# Altium PCB v0.PcbDoc
Units mm, origin at the board's own origin, x right, y up, seen from the top; angles counter-clockwise.
Board outline 22 x 44.02 mm, 2 copper layers (Top Layer, Bottom Layer), stack 0.325 mm thick; 50 components, 35 nets, 127 pads, 208 vias.
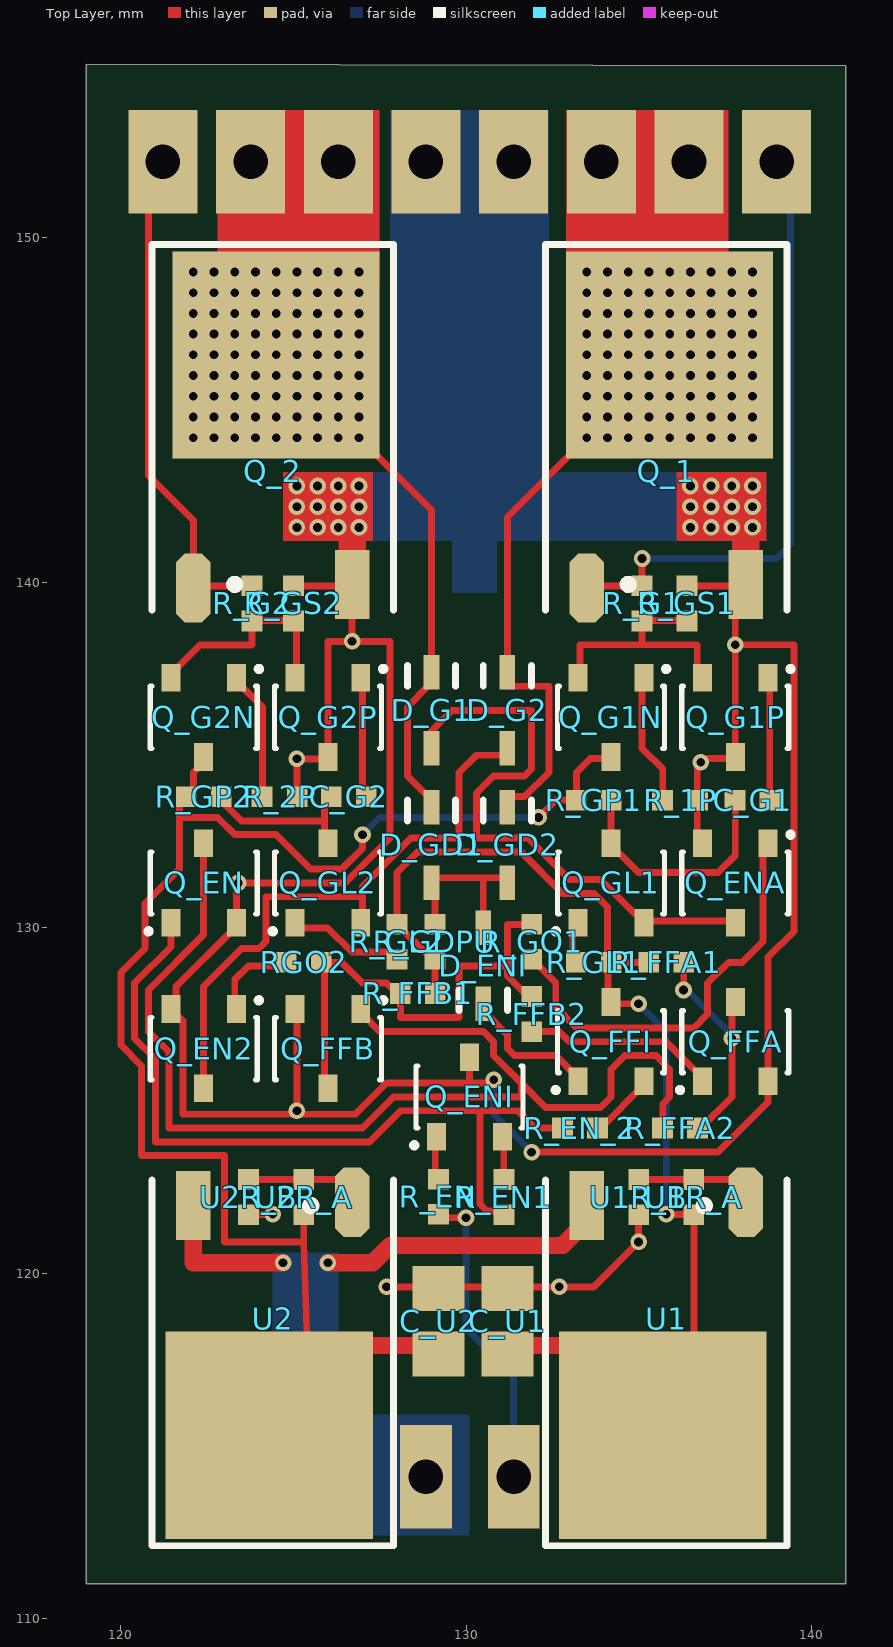
[diagram p0: Top Layer view]
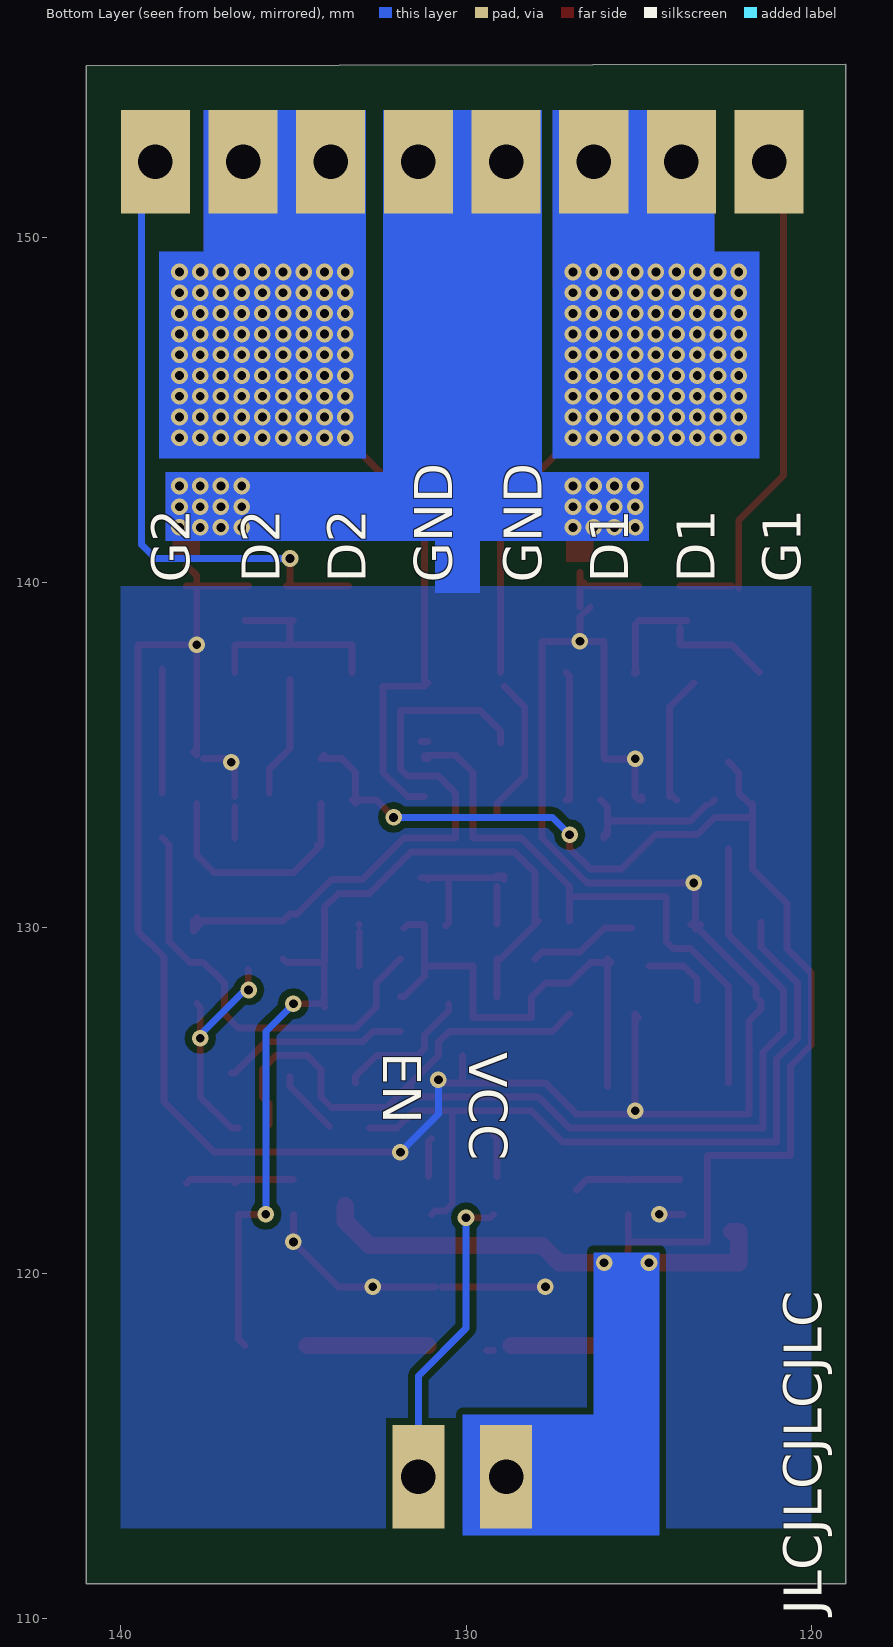
[diagram p1: Bottom Layer view, seen from below]
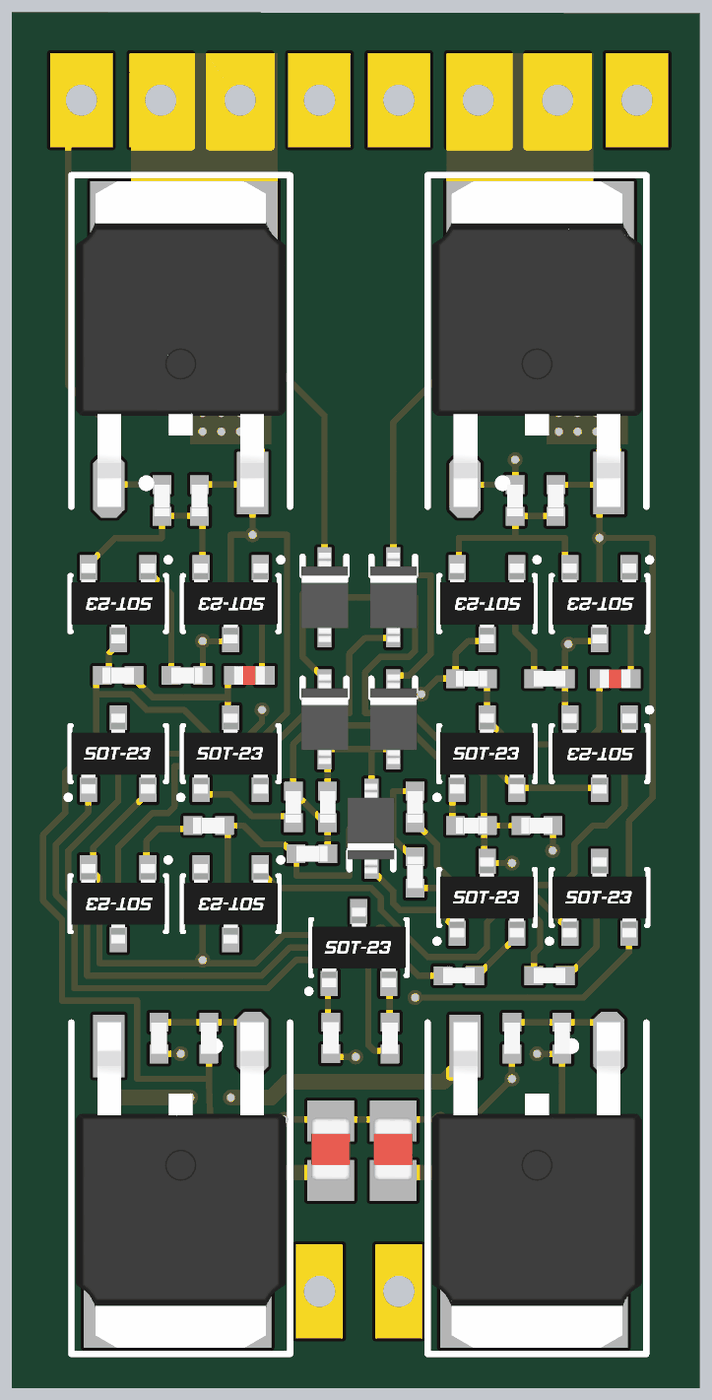
[diagram p2: 3D render of the assembled board from above, using the file's embedded part models]

## Layer stack, top to bottom
Top Solder: solder mask 0.0102, Solder Resist, Dk 3.5
Top Layer: signal copper 0.0356
Dielectric 1: core 0.254, FR-4, Dk 4.2
Bottom Layer: signal copper 0.0356
Bottom Solder: solder mask 0.0102, Solder Resist, Dk 3.5

## Board outline
119,111 119,155.016 141,154.981 141,111

## Design rules (kind name [scope] priority, off if disabled: settings)
Clearance [All] p1: gap=0.2 ignorepadtopadclearanceinfootprint=FALSE except(0: Arc-Hole Track-Hole SMDPad-Hole THPad-Hole Via-Hole Fill-Hole Poly-Hole Region-Hole Text-Hole)
PolygonConnect [All] p1: thpad.connectstyle=Relief thpad.reliefconductorwidth=0.254 thpad.reliefentries=4 thpad.polygonreliefangle="90 Angle" thpad.airgapwidth=0.254 smdpad.connectstyle=Relief smdpad.reliefconductorwidth=0.254 smdpad.reliefentries=4 smdpad.polygonreliefangle="90 Angle" smdpad.airgapwidth=0.254 via.connectstyle=Direct via.reliefconductorwidth=0.254 via.reliefentries=4 via.polygonreliefangle="90 Angle" via.airgapwidth=0.254
RoutingVias [All] p1: holewidth=0.711 width=1.27 viastyle="Through Hole" minholewidth=0.711 minwidth=1.27 maxholewidth=0.711 maxwidth=1.27
SolderMaskExpansion [All] p1: expansion=0.102
Width [All] p1: maxlimit=1 minlimit=0.2 preferedwidth=0.2 minimp=50.000000 maximp=50.000000 favimp=50.000000
30 further rules are at their usual default settings.

## Components (designator, comment, footprint, x,y, rotation, side; value= is the part's Value field where it differs from the comment)
C_G1 "CL05B224KO5NNNC" "CAP 0402" 138.3,133.7 r0 top value=220nF
C_G2 "CL05B224KO5NNNC" "CAP 0402" 126.6,133.8 r0 top value=220nF
C_U1 "CL21A106KAYNNNE" "CAP 0805" 131.2,118.6 r270 top value=10uF
C_U2 "CL21A106KAYNNNE" "CAP 0805" 129.2,118.6 r270 top value=10uF
D_ENI "N4148WS" sod-323 130.5,128.9 r90 top
D_G1 "N4148WS" sod-323 129,136.3 r270 top
D_G2 "N4148WS" sod-323 131.2,136.3 r270 top
D_GD1 "N4148WS" sod-323 129,132.4 r270 top
D_GD2 "N4148WS" sod-323 131.2,132.4 r270 top
Q_1 "IPD034N06N3G" to-252-2 135.9,146.6 r90 top
Q_2 "IPD034N06N3G" to-252-2 124.5,146.6 r90 top
Q_EN "SS8050" SOT-23-3 122.4,131.3 r90 top
Q_EN2 "SS8050" SOT-23-3 122.4,126.5 r270 top
Q_ENA "SS8050" SOT-23-3 137.8,131.3 r270 top
Q_ENI "SS8050" SOT-23-3 130.1,125.1 r90 top
Q_FFA "SS8050" SOT-23-3 137.8,126.7 r90 top
Q_FFB "SS8050" SOT-23-3 126,126.5 r270 top
Q_FFI "SS8050" SOT-23-3 134.2,126.7 r90 top
Q_G1N "SS8050" SOT-23-3 134.2,136.1 r270 top
Q_G1P "SS8550" SOT-23-3 137.8,136.1 r270 top
Q_G2N "SS8050" SOT-23-3 122.4,136.1 r270 top
Q_G2P "SS8550" SOT-23-3 126,136.1 r270 top
Q_GL1 "SS8050" SOT-23-3 134.2,131.3 r90 top
Q_GL2 "SS8050" SOT-23-3 126,131.3 r90 top
R_1P "0402WGF1002TCE" "RES 0402" 136.2,133.7 r180 top value=10k
R_2P "0402WGF1002TCE" "RES 0402" 124.6,133.8 r0 top value=10k
R_EN "0402WGF1501TCE" "RES 0402" 129.2,122.208 r270 top value=1.5k
R_EN1 "0402WGF1501TCE" "RES 0402" 131.1,122.2 r270 top value=1.5k
R_EN_2 "0402WGF1002TCE" "RES 0402" 133.3,124.2 r180 top value=10k
R_FFA1 "0402WGF1002TCE" "RES 0402" 135.8,129 r180 top value=10k
R_FFA2 "0402WGF3902TCE" "RES 0402" 136.2,124.2 r180 top value=39k
R_FFB1 "0402WGF1002TCE" "RES 0402" 128.6,128.1 r0 top value=10k
R_FFB2 "0402WGF3902TCE" "RES 0402" 131.9,127.5 r90 top value=39k
R_G1 "0402WGF0000TCE" "RES 0402" 135.1,139.4 r90 top value=0R
R_G2 "0402WGF0000TCE" "RES 0402" 123.8,139.4 r90 top value=0R
R_GDPU "0402WGF1501TCE" "RES 0402" 129.1,129.6 r270 top value=1.5k
R_GL1 "0402WGF1002TCE" "RES 0402" 133.7,129 r0 top value=10k
R_GL2 "0402WGF1002TCE" "RES 0402" 128,129.6 r270 top value=10k
R_GO1 "0402WGF1501TCE" "RES 0402" 131.9,129.6 r270 top value=1.5k
R_GP1 "0402WGF1501TCE" "RES 0402" 133.7,133.7 r180 top value=1.5k
R_GP2 "0402WGF1501TCE" "RES 0402" 122.4,133.8 r0 top value=1.5k
R_GS1 "0402WGF1002TCE" "RES 0402" 136.4,139.4 r270 top value=10k
R_GS2 "0402WGF1002TCE" "RES 0402" 125,139.4 r90 top value=10k
RGO2 "0402WGF1501TCE" "RES 0402" 125.3,129 r0 top value=1.5k
U1 "LM317AG-TN3-R" TO-252-2 135.7,115.3 r270 top
U1R_A "0402WGF1002TCE" "RES 0402" 136.6,122.2 r90 top value=10k
U1R_B "0402WGF3301TCE" "RES 0402" 135,122.2 r90 top value=3.3k
U2 "LM317AG-TN3-R" TO-252-2 124.3,115.3 r270 top
U2R_A "0402WGF1002TCE" "RES 0402" 125.3,122.2 r90 top value=10k
U2R_B "0402WGF3301TCE" "RES 0402" 123.7,122.2 r90 top value=3.3k

## Footprints (in the part's own frame and the unit in brackets; to place one, negate y for a bottom-side part, rotate by r counter-clockwise, add the part's x,y. Pads: shape width x height; smd on the part's side, far side on the other; paste and mask are expansions set on the pad)
"CAP 0402" [mm] "Chip Capacitor; Body 1.0 x 0.5 mm (LxW typ)"
  rect 0.6x0.6 smd: 1(-0.508,0) 2(0.508,0)
  body extent -0.5,-0.3 0.5,0.3, height 0.2
"CAP 0805" [mm] "Chip Capacitor; Body 2.0 x 1.2 mm (LxW typ)"
  rect 1.3x1.5 smd: 1(-0.95,0) 2(0.95,0)
  body extent -1.05,-0.62 0.95,0.62, height 0.78
"RES 0402" [mm] "Body 1.0 x 0.5 mm (LxW typ)"
  rect 0.6x0.6 smd: 1(-0.508,0) 2(0.508,0)
  body extent -0.5,-0.25 0.5,0.25, height 0.35
sod-323 [mm] "SOD-323/SC-76; 2 Leads; Body 1.7 x 1.3 mm, (LxW)"
  rect 1x0.45 smd: 1(-1.1,0) 2(1.1,0)
  silkscreen extent -1.3,-0.7 -0.7,0.7, body extent -1.43,-0.74 1.43,0.76, height 1.12
SOT-23-3 [mm] "SOT-23-3 Leads; Body 3.1 x 3 mm, inc. leads (LxW max)"
  rect 0.8x0.55 smd: 1(-1.15,0.95) 2(-1.15,-0.95) 3(1.15,0)
  silkscreen extent -1.45,-1.55 0.9,1.65, body extent -1.28,-1.5 1.27,1.5, height 1
to-252-2 [mm] "DPAK"
  oct 2x1 smd: 1(-6.75,2.4)
  rect 6x6 smd: 2(0,0)
  rect 2x1 smd: 3(-6.65,-2.2)
  silkscreen extent -7.4,-3.4 3.2,3.6, body extent -7.41,-3.26 3.01,3.46, height 2.39
TO-252-2 [mm] "DPAK"
  oct 2x1 smd: 1(-6.75,2.4)
  rect 6x6 smd: 2(0,0)
  rect 2x1 smd: 3(-6.65,-2.2)
  silkscreen extent -7.4,-3.4 3.2,3.6, body extent -7.41,-3.26 3.01,3.46, height 2.39

## Part data
C_G1 C_G2: "CAPACITOR MLCC - 220nF 16V 0402", JLC Availability=Basic, LCSC Part #=C16772, WVDC=16
C_U1 C_U2: "CAPACITOR MLCC - 10uF 25V 0805", LCSC Part #=C15850, Availability=Basic, WVDC=25
D_ENI D_G1 D_G2 D_GD1 D_GD2: "DIODE - 100V 150MA 1.25V @ 150MA 4NS SOD-323", JLC Availability=Basic, LCSC Part #=C2128, If=150mA, PIV=100V, Trr=4ns
Q_1 Q_2: "MOSFET (N) - TRENCH 60V 100A 4V @ 93UA 3.4 M? @ 100A,10V TO-252-2(DPAK) ROHS", JLC Availability=Extended, LCSC Part #=C94897
Q_EN Q_EN2 Q_ENA Q_ENI Q_FFA Q_FFB Q_FFI Q_G1N Q_G2N Q_GL1 Q_GL2: "BJT NPN - 25V 1.5A", JLC Availability=Basic, LCSC Part #=C2150
Q_G1P Q_G2P: "BJT PNP - 25V 1.5A", JLC Availability=Basic, LCSC Part #=C8542
R_1P R_2P R_EN_2 R_FFA1 R_FFB1 R_GL1 R_GL2 R_GS1 R_GS2 U1R_A U2R_A: "RESISTOR SMD - 10k 1% 0402", JLC Availability=Basic, LCSC Part #=C25744
R_EN R_EN1 R_GDPU R_GO1 R_GP1 R_GP2 RGO2: "RESISTOR SMD - 1.5k 1% 0402", JLC Availability=Basic, LCSC Part #=C25867
R_FFA2 R_FFB2: "RESISTOR SMD - 39k 1% 0402", JLC Availability=Basic, LCSC Part #=C25783
R_G1 R_G2: "RESISTOR SMD - 0R 1% 0402", JLC Availability=Basic, LCSC Part #=C17168
U1 U2: "IC - LDO", JLC Availability=Basic, LCSC Part #=C75510, VOut=ADJ
U1R_B U2R_B: "RESISTOR SMD - 3.3k 1% 0402", JLC Availability=Basic, LCSC Part #=C25890

## Free pads (board coordinates)
  rect 2x3 hole 1: M(121.22,152.2) M(123.76,152.2) M(126.3,152.2) M(128.84,152.2) M(131.38,152.2) M(133.92,152.2) M(136.46,152.2) M(139,152.2)
  rect 1.5x3 hole 1: M(128.84,114.1) M(131.38,114.1)

## Via types
v1: diameter 0.48, hole 0.254, Top Layer to Bottom Layer, tented both sides, 208 vias

## Nets (pads, with @x,y where several pads share a name; then routed paths per layer and width w, separated by ;. In a path a pad name is that pad's centre, name@x,y a point inside that pad or via, vN(x,y) a via of type N, cw(c..) or ccw(c..) an arc to the next point about the centre after c; other vN are vias at no path point)
DO_IT: pad.M@131.38,114.1 R_EN.2 | length 8.8
  Top Layer w0.2: R_EN.2 129.3,121.6 v1(130,121.6)
  Bottom Layer w0.2: v1@130,121.5 130,118.4 131.38,117.02 pad.M@131.38,114.1
GND: C_U1.1 C_U2.1 pad.M@128.84,152.2 pad.M@131.38,152.2 Q_1.3 Q_2.3 Q_EN2.2 Q_EN.2 Q_ENA.2 Q_ENI.3 Q_FFA.2 Q_FFB.2 Q_G1P.3 Q_G2P.3 R_1P.1 R_2P.2 R_GS1.1 R_GS2.2 U1R_B.1 U2R_B.1 | length 87.8
  Top Layer w0.2: Q_EN2.2@121.45,127.85 Q_EN2.2 121.8,127.3 121.8,124.6 v1@125.1,124.6 ; Q_EN2.2@121.5,127.9 121.6,128 121.6,128.3 Q_EN.2@123.3,130 ; Q_EN.2@123.2,130.1 Q_EN.2@123.3,130 ; Q_EN.2@123.35,129.95 Q_EN.2@123.3,130 ; Q_EN.2@123.4,130.2 Q_EN.2 123.35,131.3 126.5,131.3 127.8,132.6 127.8,138.3 v1(126.7,138.3) 126.7,139 Q_2.3@126.4,139.3 ; Q_EN.2@123.5,130.1 123.4,130.1 Q_EN.2@123.3,130 ; U2R_B.1@123.708,121.7 v1@124.5,121.7 ; R_2P.2@124.9,133.708 124.9,133.808 R_2P.2@125.008,133.7 ; Q_FFB.2@125,127.4 125.1,127.5 v1@125.1,124.6 ; R_GS2.2 126.508,139.908 Q_2.3@126.6,140 ; R_2P.2 125.108,134.892 125.992,134.892 Q_G2P.3@126,134.9 ; Q_G2P.3@126,135 126,138.3 v1@126.6,138.3 ; Q_2.3@126.7,139.3 Q_2.3@126.7,140.3 ; v1(127.7,119.6) C_U1.1@130.7,119.6 ; Q_ENI.3@130.1,126.3 130.1,125.5 ; v1(130.8,125.6) 130.7,125.6 130.8,125.5 130.1,125.5 ; C_U1.1@130.9,119.6 v1(132.7,119.6) ; v1@132,123.5 137.3,123.5 138.75,124.95 Q_FFA.2 138.75,129.15 139.5,129.9 139.5,138.2 v1(137.8,138.2) ; v1@132.9,119.6 133.7,119.6 v1(135,120.9) U1R_B.1 ; R_GS1.1@136.3,139.9 Q_1.3@137.8,139.9 ; Q_ENA.2@136.7,132.6 R_1P.1@136.7,133.508 ; R_1P.1@136.7,133.8 136.7,134.6 137,134.9 Q_G1P.3@137.6,134.9 ; Q_G1P.3@137.8,135 Q_G1P.3@137.9,135.1 ; Q_G1P.3@137.8,135.1 v1(137.8,138.2) ; v1@137.8,138.4 v1(137.8,138.2) ; Q_1.3@138.1,139.9 Q_1.3@137.8,139.9 ; Q_1.3@138.1,140.5 137.8,140.2 Q_1.3@137.8,139.9 ; v1@125.1,124.6 126.8,124.6 127.7,125.5 130.1,125.5 ; v1(137.8,138.2) 137.8,138.6 Q_1.3@137.8,139.9
  Bottom Layer w0.2: v1@130.9,125.5 v1(130.8,125.6) 130.8,124.6 v1(131.9,123.5)
  other v1: 124.4,121.7 125.1,124.7 123.4,131.3 136.8,134.8 125.1,134.9 125.1,141.6 125.7,141.6 126.3,141.6 126.9,141.6 136.5,141.6 137.1,141.6 137.7,141.6 138.3,141.6 125.1,142.2 125.7,142.2 126.3,142.2 126.9,142.2 136.5,142.2 137.1,142.2 137.7,142.2 138.3,142.2 125.1,142.8 125.7,142.8 126.3,142.8 126.9,142.8 136.5,142.8 137.1,142.8 137.7,142.8 138.3,142.8
NetC_G1_1: C_G1.1 Q_GL1.3 R_GP1.1 | length 6.8
  Top Layer w0.2: Q_GL1.3@134.2,132.4 R_GP1.1@134.2,133.608 ; Q_GL1.3@134.3,132.4 134.3,132.3 135,131.6 137.3,131.6 137.8,132.1 C_G1.1@137.8,133.6
NetC_G1_2: C_G1.2 Q_G1P.1 | length 3.6
  Top Layer w0.2: C_G1.2@138.8,133.9 Q_G1P.1@138.8,137.5
NetC_G2_1: C_G2.1 Q_GL2.3 R_GP2.2 | length 5
  Top Layer w0.2: R_GP2.2@122.808,133.7 R_GP2.2@122.9,133.608 ; R_GP2.2@123.05,133.55 123.5,133.1 125.9,133.1 Q_GL2.3@125.9,132.7 ; C_G2.1@126.092,133.7 125.9,133.508 125.9,132.8 Q_GL2.3@126,132.7 ; Q_GL2.3@125.9,132.7 Q_GL2.3@126,132.7 ; Q_GL2.3@125.9,132.7 126,132.6 Q_GL2.3@126,132.7
NetC_G2_2: C_G2.2 Q_G2P.1 | length 3.9
  Top Layer w0.2: C_G2.2@127,133.708 127,137.3 Q_G2P.1@127.1,137.4 ; C_G2.2@127,133.8 127,133.808 C_G2.2@127.108,133.7
NetD_ENI_1: D_ENI.1 Q_FFI.1 | length 4.1
  Top Layer w0.2: D_ENI.1 130.5,127.6 131.2,126.9 131.2,126.5 131.4,126.3 132.6,126.3 133.2,125.7 Q_FFI.1@133.2,125.5
NetD_ENI_2: D_ENI.2 D_GD1.2 D_GD2.2 R_GDPU.1 | length 5.3
  Top Layer w0.2: D_GD1.2@128.9,131.4 128.95,131.45 129,131.45 D_GD1.2@129.1,131.45 ; D_GD1.2@128.9,131.5 129.1,131.5 D_GD1.2@129.1,131.45 ; R_GDPU.1 D_GD1.2@129.1,131.2 ; D_ENI.2@130.6,130.05 130.5,130.15 130.5,131.45 ; D_GD2.2@131.1,131.4 D_GD2.2@131.05,131.45 ; D_GD2.2@131.3,131.45 131.2,131.45 D_GD2.2@131.05,131.45 ; D_GD1.2@129.1,131.45 130.5,131.45 ; 130.5,131.45 D_GD2.2@131.05,131.45
NetD_G1_1: D_G1.1 D_GD1.1 pad.M@123.76,152.2 pad.M@126.3,152.2 Q_2.2 | length 13.5
  Top Layer w0.2: Q_2.2@125.9,145.2 129,142.1 D_G1.1 ; D_G1.1@128.9,137 128.3,136.4 128.3,134.4 129.1,133.6 D_GD1.1@129.1,133.2
  other v1: 122.1,144.2 122.7,144.2 123.3,144.2 123.9,144.2 124.5,144.2 125.1,144.2 125.7,144.2 126.3,144.2 126.9,144.2 122.1,144.8 122.7,144.8 123.3,144.8 123.9,144.8 124.5,144.8 125.1,144.8 125.7,144.8 126.3,144.8 126.9,144.8 122.1,145.4 122.7,145.4 123.3,145.4 123.9,145.4 124.5,145.4 125.1,145.4 125.7,145.4 126.3,145.4 126.9,145.4 122.1,146 122.7,146 123.3,146 123.9,146 124.5,146 125.1,146 125.7,146 126.3,146 126.9,146 122.1,146.6 122.7,146.6 123.3,146.6 123.9,146.6 124.5,146.6 125.1,146.6 125.7,146.6 126.3,146.6 126.9,146.6 122.1,147.2 122.7,147.2 123.3,147.2 123.9,147.2 124.5,147.2 125.1,147.2 125.7,147.2 126.3,147.2 126.9,147.2 122.1,147.8 122.7,147.8 123.3,147.8 123.9,147.8 124.5,147.8 125.1,147.8 125.7,147.8 126.3,147.8 126.9,147.8 122.1,148.4 122.7,148.4 123.3,148.4 123.9,148.4 124.5,148.4 125.1,148.4 125.7,148.4 126.3,148.4 126.9,148.4 122.1,149 122.7,149 123.3,149 123.9,149 124.5,149 125.1,149 125.7,149 126.3,149 126.9,149
NetD_G1_2: D_G1.2 Q_ENA.3 Q_GL1.2 | length 17.6
  Top Layer w0.2: D_G1.2@129,135.35 129,135.7 129.6,136.3 131.9,136.3 131.9,134.6 131.7,134.4 130.8,134.4 130.3,133.9 130.3,132.6 131.8,132.6 133,131.4 133.9,131.4 134.9,130.4 Q_GL1.2@135.1,130.4 ; Q_GL1.2@135.15,130.35 135.3,130.2 Q_ENA.3@137.6,130.2 ; Q_ENA.3@137.8,130.3 137.7,130.2 Q_ENA.3@137.6,130.2 ; Q_ENA.3@137.9,130.2 137.9,129.9 Q_ENA.3@137.6,130.2
NetD_G2_1: D_G2.1 D_GD2.1 pad.M@133.92,152.2 pad.M@136.46,152.2 Q_1.2 | length 15.2
  Top Layer w0.2: D_G2.1@131.1,137.1 D_G2.1@131.2,137 ; D_GD2.1@131.2,133.8 131.7,133.8 132.4,134.5 132.4,137 D_G2.1@131.2,137 ; Q_1.2@133.6,145.9 133.6,144.3 131.2,141.9 D_G2.1 D_G2.1@131.2,137
  other v1: 133.5,144.2 134.1,144.2 134.7,144.2 135.3,144.2 135.9,144.2 136.5,144.2 137.1,144.2 137.7,144.2 138.3,144.2 133.5,144.8 134.1,144.8 134.7,144.8 135.3,144.8 135.9,144.8 136.5,144.8 137.1,144.8 137.7,144.8 138.3,144.8 133.5,145.4 134.1,145.4 134.7,145.4 135.3,145.4 135.9,145.4 136.5,145.4 137.1,145.4 137.7,145.4 138.3,145.4 133.5,146 134.1,146 134.7,146 135.3,146 135.9,146 136.5,146 137.1,146 137.7,146 138.3,146 133.5,146.6 134.1,146.6 134.7,146.6 135.3,146.6 135.9,146.6 136.5,146.6 137.1,146.6 137.7,146.6 138.3,146.6 133.5,147.2 134.1,147.2 134.7,147.2 135.3,147.2 135.9,147.2 136.5,147.2 137.1,147.2 137.7,147.2 138.3,147.2 133.5,147.8 134.1,147.8 134.7,147.8 135.3,147.8 135.9,147.8 136.5,147.8 137.1,147.8 137.7,147.8 138.3,147.8 133.5,148.4 134.1,148.4 134.7,148.4 135.3,148.4 135.9,148.4 136.5,148.4 137.1,148.4 137.7,148.4 138.3,148.4 133.5,149 134.1,149 134.7,149 135.3,149 135.9,149 136.5,149 137.1,149 137.7,149 138.3,149
NetD_G2_2: D_G2.2 Q_EN2.3 Q_GL2.2 | length 17.4
  Top Layer w0.2: Q_EN2.3@122.4,125.5 122.4,128.3 123.5,129.4 124,129.4 124.2,129.6 124.2,130.9 127,130.9 ; Q_GL2.2@127,130.2 127,130.9 ; D_G2.2@131.1,134.9 D_G2.2@131.2,134.9 ; D_G2.2@131.1,135.4 D_G2.2@131.3,135.4 ; D_G2.2@131.2,135 130.3,135 129.8,134.5 129.8,132.6 128.4,132.6 127,131.2 127,130.9
NetQ_1_1: pad.M@139,152.2 Q_1.1 R_G1.2 | length 17.7
  Top Layer w0.2: Q_1.1@133.4,139.9 R_G1.2@135.2,139.9 ; R_G1.2 v1(135.1,140.7)
  Bottom Layer w0.2: v1(135.1,140.7) 139,140.7 139.4,141.1 pad.M@139.4,151.7
NetQ_2_1: pad.M@121.22,152.2 Q_2.1 R_G2.2 | length 13.5
  Top Layer w0.2: pad.M@120.8,151.3 120.8,143.1 122.1,141.8 Q_2.1 ; Q_2.1@122.3,139.908 R_G2.2@123.808,139.908
NetQ_EN2_1: Q_EN2.1 RGO2.1 | length 2.2
  Top Layer w0.2: Q_EN2.1@123.3,127.9 123.3,128.5 123.7,128.9 RGO2.1@124.7,128.9
NetQ_EN_1: Q_EN.1 R_EN1.2 R_EN_2.2 | length 22.8
  Top Layer w0.2: Q_EN.1 121.45,129.45 120.4,128.4 120.4,126.8 121,126.2 121,123.8 127.2,123.8 128.1,124.7 130.4,124.7 ; R_EN1.2@131,121.7 130.9,121.8 130.6,121.8 130.4,122 130.4,124.7 ; R_EN_2.2@132.8,124.2 R_EN_2.2 132,124.2 131.5,124.7 130.4,124.7
NetQ_EN_3: Q_EN.3 Q_FFB.1 R_FFA2.2 | length 33.2
  Top Layer w0.2: Q_EN.3@122.4,132.3 122.4,129.8 120.8,128.2 120.8,127 121.4,126.4 121.4,124.2 127,124.2 127.9,125.1 131.6,125.1 131.6,125.5 ; Q_FFB.1@127,127.5 127.5,127 130.5,127 130.8,126.7 130.8,126.3 131.6,125.5 ; R_FFA2.2@135.7,124.3 135.7,124.9 135.9,125.1 135.9,125.9 135.5,126.3 134.6,126.3 134.2,125.9 134.2,125.1 133.9,124.8 132.3,124.8 131.6,125.5
NetQ_ENA_1: Q_ENA.1 R_GO1.2 | length 12.6
  Top Layer w0.2: R_GO1.2@131.9,129.1 R_GO1.2 131.908,129.092 132.6,128.4 132.6,127.7 133.2,127.1 136.6,127.1 137,127.5 137,128.4 137.6,129 138,129 138.6,129.6 138.6,132.4 Q_ENA.1@138.8,132.6
NetQ_ENI_1: Q_ENI.1 R_EN.1 | length 1.2
  Top Layer w0.2: R_EN.1@129.108,122.8 129.108,123.908 Q_ENI.1@129.2,124
NetQ_ENI_2: Q_ENI.2 R_EN1.1 | length 1.1
  Top Layer w0.2: Q_ENI.2@131,123.9 131.092,123.808 R_EN1.1@131.092,122.8
NetQ_FFA_1: Q_FFA.1 R_FFB2.1 | length 5.4
  Top Layer w0.2: R_FFB2.1@131.9,127 132.7,127 133,126.7 135.8,126.7 136.7,125.8 Q_FFA.1@136.8,125.8
NetQ_FFA_3: Q_FFA.3 R_FFA1.1 R_FFA2.1 | length 6.8
  Top Layer w0.2: v1@136.308,128.208 R_FFA1.1@136.308,128.8 ; R_FFA2.1@136.608,124.2 R_FFA2.1 136.8,124.2 137.7,125.1 137.7,127.7 137.8,127.8 Q_FFA.3@137.792,127.808
  Bottom Layer w0.2: v1(136.3,128.2) 136.4,128.2 137.7,126.9 v1(137.7,126.8)
NetQ_FFB_3: Q_FFB.3 R_FFB1.1 R_FFB2.2 R_GO1.1 RGO2.2 | length 14.7
  Top Layer w0.2: RGO2.2@125.8,129 125.9,129.1 RGO2.2@125.9,129 ; Q_FFB.3@125.9,125.4 RGO2.2@125.9,129 ; R_GO1.1@131.8,130 131.7,130.1 131.2,130.1 131.2,128.9 ; R_FFB2.2 131.792,128.008 131.2,128.6 131.2,128.9 ; RGO2.2@125.9,129 126.4,129 127,128.4 127.7,128.4 128.1,128 128.1,127.4 129.8,127.4 129.8,128.9 131.2,128.9
NetQ_FFI_2: Q_FFI.2 R_EN_2.1 | length 1.9
  Top Layer w0.2: R_EN_2.1@133.95,124.25 135.1,125.4 Q_FFI.2@135.1,125.7
NetQ_G1N_1: Q_G1N.1 R_1P.2 | length 4.2
  Top Layer w0.2: Q_G1N.1@135.1,137.2 135.1,135.2 135.7,134.6 ; 135.7,134.6 135.7,133.9 135.7,134.6
NetQ_G1N_2: Q_G1N.2 Q_G1P.2 R_G1.1 R_GS1.2 | length 6.9
  Top Layer w0.2: Q_G1N.2@133.3,137.4 133.3,138.2 135.1,138.2 136.7,138.2 Q_G1P.2@136.7,137.4 ; R_G1.1@135,138.9 R_GS1.2@136.4,138.9 ; 135.1,138.3 R_G1.1@135.1,138.8
NetQ_G2N_1: Q_G2N.1 R_2P.1 | length 3.9
  Top Layer w0.2: Q_G2N.1@123.4,137.1 124.1,136.4 R_2P.1@124.1,133.9 ; R_2P.1@123.9,133.7 R_2P.1@124.1,133.9 ; R_2P.1@124.1,133.8 R_2P.1@124.1,133.9
NetQ_G2N_2: Q_G2N.2 Q_G2P.2 R_G2.1 R_GS2.1 | length 6.2
  Top Layer w0.2: Q_G2N.2@121.5,137.4 122.3,138.2 122.7,138.2 ; 122.4,138.192 123.792,138.192 ; R_G2.1@123.6,138.908 R_GS2.1@125,138.908 ; 123.8,138.2 R_G2.1@123.8,138.7 ; Q_G2P.2@125.092,137.408 R_GS2.1@125.092,138.8
  Top Layer w0.254: Q_G2P.2@125.092,137.408 Q_G2P.2@125.1,137.4
NetQ_GL1_1: Q_GL1.1 R_GL1.1 | length 1
  Top Layer w0.2: R_GL1.1@133.092,128.9 Q_GL1.1@133.092,129.892 ; Q_GL1.1@133.092,130.092 Q_GL1.1@133.1,130.1
NetQ_GL2_1: Q_GL2.1 R_GL2.2 | length 3.2
  Top Layer w0.2: Q_GL2.1@125.2,130 125.992,130 126.692,129.3 127.8,129.3 R_GL2.2@128,129.1
NetU1_1: U1.1 U1R_A.2 U1R_B.2 | length 3.3
  Top Layer w0.2: U1R_B.2 136.592,122.708 U1R_A.2@136.7,122.6 ; U1R_A.2 137.992,122.708 U1.1@138.1,122.6
NetU2_1: U2.1 U2R_A.2 U2R_B.2 | length 3
  Top Layer w0.2: U2R_B.2@123.8,122.708 125.292,122.708 U2R_A.2@125.3,122.7 ; U2R_A.2@125.4,122.708 126.492,122.708 U2.1@126.8,122.4
VCC: pad.M@128.84,114.1 U1.3 U2.3 | length 13.4
  Top Layer w0.5: U2.3@122.3,121.2 122.1,121.2 122.1,120.3 v1(124.7,120.3) ; v1(126,120.3) 127.3,120.3 127.8,120.8 132.8,120.8 133.5,121.5 U1.3
  Bottom Layer w0.5: v1(124.7,120.3) v1(126,120.3)
VCC_5: C_U1.2 Q_FFI.3 R_FFA1.2 R_FFB1.2 R_GDPU.2 R_GL1.2 R_GL2.1 U1.2 U1R_A.1 | length 30.7
  Top Layer w0.2: R_GL2.1@127.9,130.2 129.008,129.092 R_GDPU.2 ; R_GL2.1 128,131.6 128.6,132.2 131.6,132.2 132.8,131 133.7,131 134.1,130.6 R_GL1.2@134.1,129 ; R_FFB1.2@129.1,128 R_FFB1.2@129.1,128.092 ; R_GDPU.2@129.1,129.1 R_GDPU.2 ; R_FFB1.2 R_FFB1.2@129.1,128.092 ; R_GDPU.2@129.108,129.1 R_GDPU.2 ; Q_FFI.3@134.1,127.7 134.108,127.708 Q_FFI.3@134.108,127.85 ; Q_FFI.3@134.1,127.85 Q_FFI.3@134.108,127.85 ; R_GL1.2@134.108,128.9 Q_FFI.3@134.108,127.85 ; Q_FFI.3 134.25,127.8 134.9,127.8 v1@135,127.9 ; R_GL1.2 135.2,129 R_FFA1.2@135.3,129.1 ; v1@135.808,121.692 U1R_A.1 136.6,118.1 U1.2@136.4,117.9 ; R_FFB1.2@129.1,128.092 R_GDPU.2
  Top Layer w0.5: C_U1.2@131.1,117.9 U1.2@134.6,117.9
  Bottom Layer w0.2: v1(135,127.8) 135.8,127 v1(135.8,121.7)
VCC_12: C_U2.2 Q_G1N.3 Q_G2N.3 R_GP1.2 R_GP2.1 U2.2 U2R_A.1 | length 42.8
  Top Layer w0.2: R_GP2.1@121.7,133.6 121.7,133.2 ; R_GP2.1@121.792,133.6 122.1,133.908 122.1,134.5 Q_G2N.3@122.4,134.8 ; U2.2@125.2,117.9 U2.2@125.4,117.9 ; U2R_A.1 125.3,120.9 ; U2.2@125.5,117.7 125.4,117.8 U2.2@125.4,117.9 ; v1(127,132.7) 127,132.3 126.4,131.7 125.5,131.7 124.5,132.7 123.3,132.7 122.8,133.2 121.7,133.2 ; C_U2.2@129.2,117.75 C_U2.2@129.4,117.75 ; v1(132.1,133.2) 132.6,133.7 133.1,133.7 R_GP1.2@133.2,133.6 ; R_GP1.2@133.3,133.7 133.2,133.8 133.2,134.5 133.6,134.9 Q_G1N.3@134.1,134.9 ; Q_G1N.3@134.1,135 Q_G1N.3@134.2,134.9 ; 121.7,133.2 121.7,131.7 120.7,130.7 120.7,129.4 120,128.7 120,126.6 120.6,126 120.6,123.4 123,123.4 123,120.9 125.3,120.9 ; 125.3,120.9 U2.2@125.4,117.9
  Top Layer w0.5: U2.2@125.4,117.9 C_U2.2@128.7,117.9
  Bottom Layer w0.2: v1(127,132.7) 127.5,133.2 v1(132.1,133.2)

## Polygon pours and split planes (outlines as drawn)
GND on Bottom Layer "Bottom Layer-GND" (solid, pour order 0): 120,139.9 140,139.9 140,112.6 120,112.6

## Other copper
Top Layer:
  rectangle net NetD_G2_1: 132.9,148.1 137.6,153.7
  rectangle net NetD_G1_1: 122.8,148.6 127.5,153.7
  rectangle net GND: 136.1,141.2 138.7,143.2
  rectangle net GND: 137.7,140.6 138.5,141.8
  rectangle net GND: 126.3,140.6 127.1,141.8
  rectangle net GND: 124.7,141.2 127.3,143.2
Bottom Layer:
  rectangle net NetD_G2_1: 132.9,143.6 138.9,149.6
  rectangle net NetD_G2_1: 132.9,148.1 137.6,153.7
  rectangle net NetD_G1_1: 122.8,148 127.5,153.7
  rectangle net NetD_G1_1: 121.5,143.6 127.5,149.6
  rectangle net VCC: 124.4,115.6 126.3,120.6
  rectangle net VCC: 124.4,112.4 130.1,115.9
  region net GND: 130.9,139.7 130.9,141.4 129.6,141.4 129.6,139.7
  region net GND: 132.4,141.2 132.4,153.7 127.8,153.7 127.8,141.2
  rectangle net GND: 124.7,141.2 138.7,143.2
  region: 132.6,112.4

## Silkscreen, mask and mechanical layers (free items; w line width, h text height)
Bottom Overlay:
  text "G1" at 120.3,140 h1.1 r270
  text "D1" at 122.8,140 h1.1 r270
  text "D1" at 125.3,140 h1.1 r270
  text "GND" at 127.8,140 h1.1 r270
  text "GND" at 130.4,140 h1.1 r270
  text "D2" at 132.9,140 h1.1 r270
  text "D2" at 135.4,140 h1.1 r270
  text "G2" at 138,140 h1.1 r270
  text "VCC" at 129.9,126.4 h1.1 r90
  text "EN" at 132.4,126.4 h1.1 r90
  text "JLCJLCJLCJLC" at 119.7,110.1 h1.1 r270
Board Outline (M30):
  the board outline again, w0.1